# EAGLE board schema0.1 (EAGLE 9.6.2)
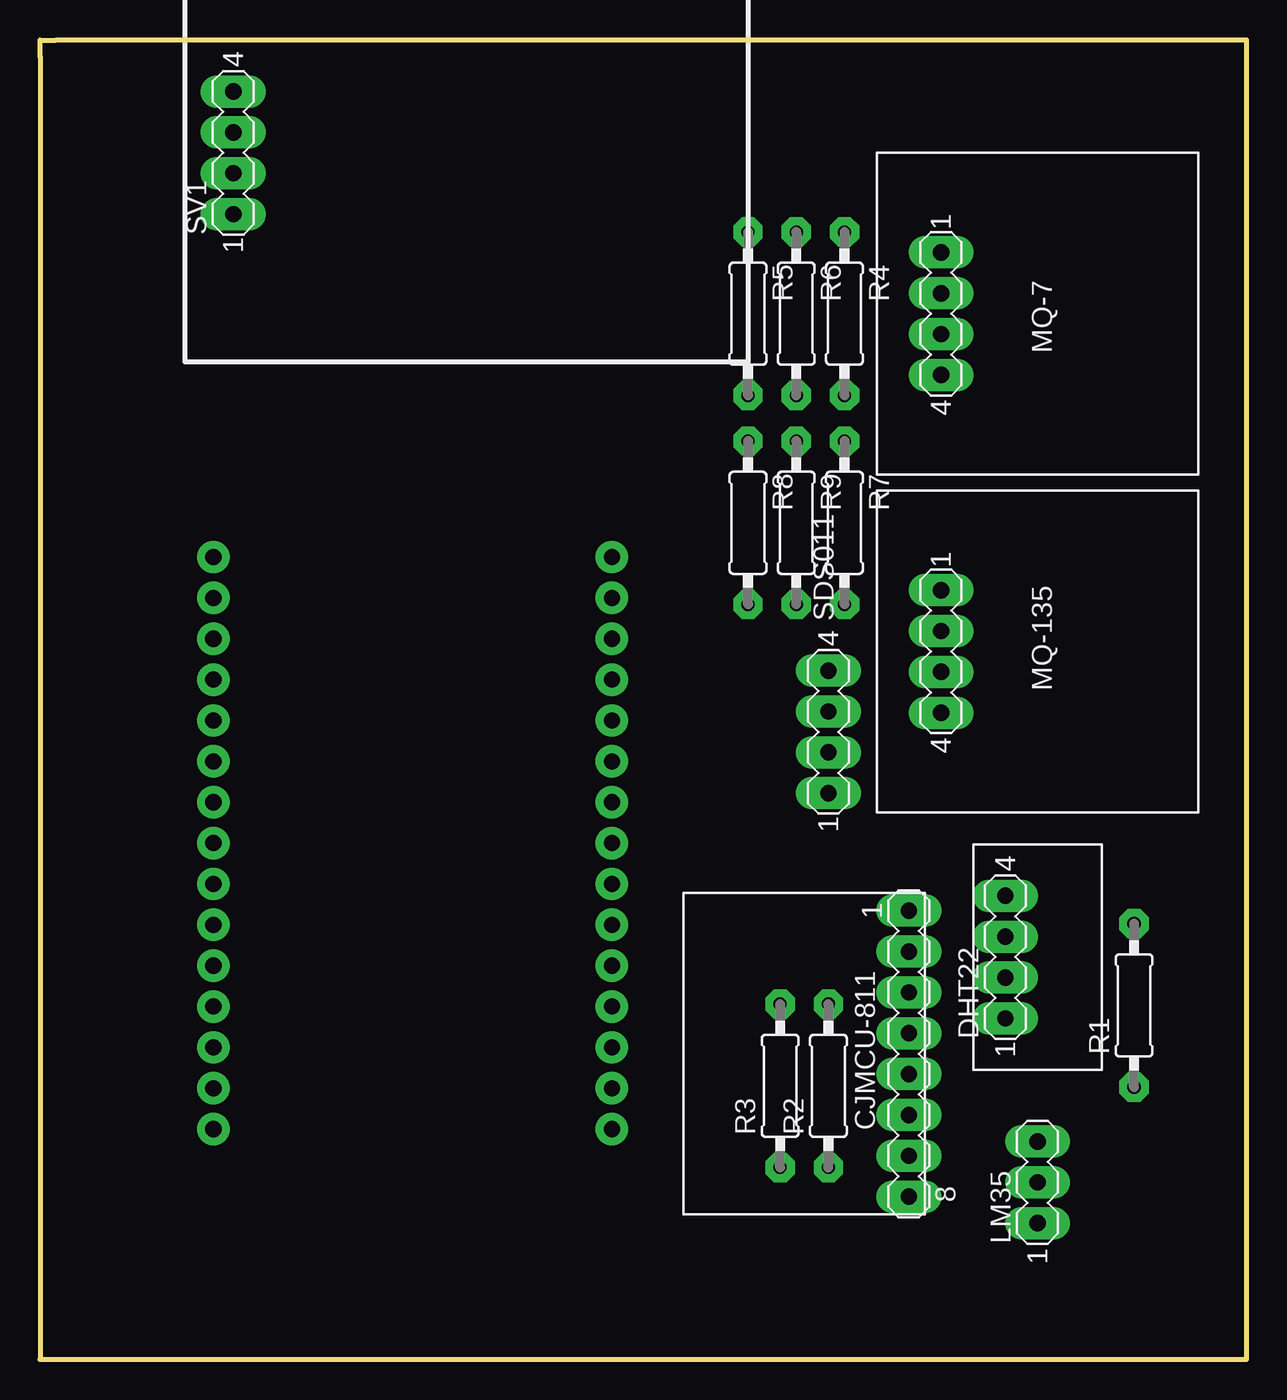
[diagram p0: board, top side]
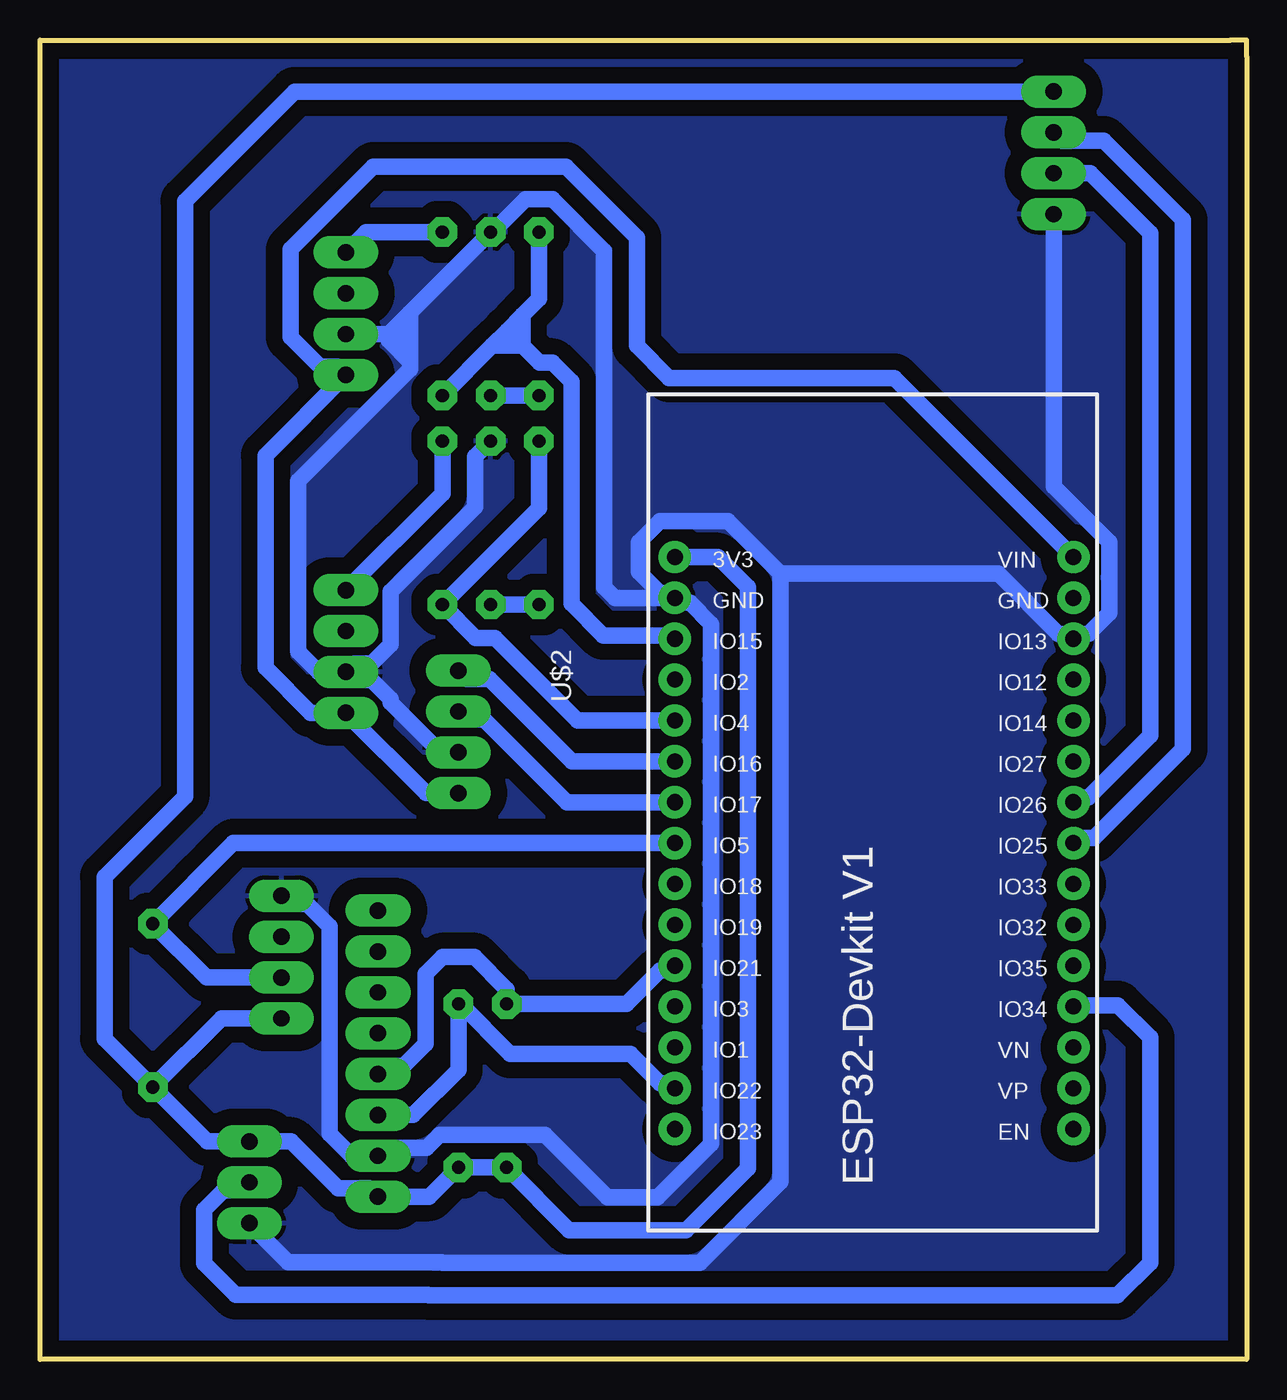
[diagram p1: board, bottom side, seen from below]

Size 75 x 82 mm. Coordinates in mm from the lower left corner, seen from the top.
Outline: 0,0 75,0 75,82 1,82 0,82 0,81 0,0
Copper layers (1*16): Top 0.035mm / dielectric 1.5mm / Bottom 0.035mm
Design rules "FreesMachien": minimum track width 40mil, minimum drill 0.4mm, track to track 40mil, track to pad 30mil, pad to pad 6mil, via to via 6mil, smd to smd 6mil, copper to edge 40mil, drill to drill 6mil, minimum pad ring 20mil, minimum via ring 20mil, stop-mask expansion 4mil, vias tented up to drill 0mil, thermal gap 10mil

## Footprints (pad centres in the part's own frame; a part is rotated, then mirrored left to right if it is on the bottom)
MA08-1 = drill 1.016 long: 1 -8.89,0; 2 -6.35,0; 3 -3.81,0; 4 -1.27,0; 5 1.27,0; 6 3.81,0; 7 6.35,0; 8 8.89,0
MA04-1 = drill 1.016 long: 1 -3.81,0; 2 -1.27,0; 3 1.27,0; 4 3.81,0
MA03-1 = drill 1.016 long: 1 -2.54,0; 2 0,0; 3 2.54,0
0207/10 = drill 0.813 octagon: 1 -5.08,0; 2 5.08,0
ESP32-DEVKITV1 = drill 1 pad 1.93: 1 -22.87,-13.54; 2 -20.33,-13.54; 3 -17.79,-13.54; 4 -15.25,-13.54; 5 -12.71,-13.54; 6 -10.17,-13.54; 7 -7.63,-13.54; 8 -5.09,-13.54; 9 -2.55,-13.54; 10 -0.01,-13.54; 11 2.53,-13.54; 12 5.07,-13.54; 13 7.61,-13.54; 14 10.15,-13.54; 15 12.69,-13.54; 16 12.69,11.23; 17 10.15,11.23; 18 7.61,11.23; 19 5.07,11.23; 20 2.53,11.23; 21 -0.01,11.23; 22 -2.55,11.23; 23 -5.09,11.23; 24 -7.63,11.23; 25 -10.17,11.23; 26 -12.71,11.23; 27 -15.25,11.23; 28 -17.79,11.23; 29 -20.33,11.23; 30 -22.87,11.23

## Placement (x,y rotation side)
CJMCU-811  [MA08-1]  54,19 270 top
DHT22  [MA04-1]  60,25 90 top
LM35  [MA03-1]  62,11 90 top
MQ-7  [MA04-1]  56,65 270 top
MQ-135  [MA04-1]  56,44 270 top
R1  10k  [0207/10]  68,22 90 top
R2  4k7  [0207/10]  49,17 90 top
R3  4k7  [0207/10]  46,17 90 top
R4  1k  [0207/10]  50,65 270 top
R5  1k  [0207/10]  44,65 270 top
R6  1k  [0207/10]  47,65 270 top
R7  1k  [0207/10]  50,52 270 top
R8  1k  [0207/10]  44,52 270 top
R9  1k  [0207/10]  47,52 270 top
SDS011  [MA04-1]  49,39 90 top
SV1  [MA04-1]  12,75 90 top
U$2  ESP32DEVKITV1  [ESP32-DEVKITV1]  22,27 270 bottom

## Library data of the parts
CJMCU-811 DHT22 LM35 MQ-7 MQ-135 SDS011 SV1 = con-lstb; OC_FARNELL: unknown; OC_NEWARK: unknown
R1-R9 = rcl; SPICEPREFIX: R
U$2 = ESP32-DEVKITV1

## Nets
0: MQ-7.1 R4.1
1: MQ-135.1 R7.1
3.3V: CJMCU-811.8 DHT22.1 LM35.3 R1.1 R2.1 R3.1 SV1.4 U$2.1
5V: MQ-7.4 MQ-135.4 SDS011.1 U$2.30
ALM35: LM35.2 U$2.19
AMQ-7: R4.2 R5.1 U$2.3
AMQ-135: R7.2 R8.1 U$2.5
DATADHT22: DHT22.2 R1.2 U$2.8
GND: CJMCU-811.7 DHT22.4 LM35.1 MQ-7.3 MQ-135.3 R6.1 R9.1 SDS011.2 SV1.1 U$2.2 U$2.28
N$1: R8.2 R9.2
N$2: R5.2 R6.2
N$14: DHT22.3
RX: SDS011.3 U$2.7
RX1: SV1.3 U$2.23
SCL: CJMCU-811.6 R2.2 U$2.14
SDA: CJMCU-811.5 R3.2 U$2.11
TX: SDS011.4 U$2.6
TX1: SV1.2 U$2.24

## Tracks (layer width: path | path; a pad name or v marks a point on that pad's centre or on a via)
0
  Bottom 1.016: R4.1 54.73,70.08 MQ-7.1
1
  Bottom 1.016: MQ-135.1 50,53.81 R7.1
3.3V
  Bottom 1.016: U$2.1 32.87,49.87 31,48 31,11.87 34.84,8.03 42.11,8.03 R3.1 R2.1 50.81,10.11 CJMCU-811.8 54.51,10.62 56.49,10.62 59.41,13.54 LM35.3 64.62,13.54 R1.1 | R1.1 63.73,21.19 DHT22.1 59.81,21 | R1.1 71,19.92 71,30 66,35 66,72 59.19,78.81 SV1.4
5V
  Bottom 1.016: SDS011.1 51,35.19 MQ-135.4 58.19,40.19 61,43 61,56.19 MQ-7.4 56.51,61.7 57.6,61.7 59.45,63.54 59.45,69 54.3,74.14 42.32,74.14 37.9,69.73 37.9,63 35.9,61 21.9,61 U$2.30
ALM35
  Bottom 1.016: U$2.19 10.84,22 8,22 6,20 6,6 8.03,3.97 50.84,3.97 50.87,4 62.84,4 64.79,5.95 64.79,9.3 63.6,10.49 62.51,10.49 LM35.2
AMQ-7
  Bottom 1.016: R4.2 46.92,63 | 46.92,63 45.96,63.96 | 45.96,63.96 45,64.92 | 45,64.92 44,65.92 R5.1 | 45,63 43.95,61.95 43.16,61.95 41.97,60.76 41.97,46.97 40,45 35.75,45 U$2.3 | 45,63 45,64.92 | 45,63 46.92,63 | 45.96,63.96 45,63
AMQ-135
  Bottom 1.016: R8.1 44,52.92 R7.2 47.92,44.84 46.73,44.84 41.6,39.71 U$2.5
DATADHT22
  Bottom 1.016: DHT22.2 64.65,23.73 R1.2 62.99,32.09 U$2.8
GND
  Bottom 1.016: MQ-7.3 53.35,63.73 | 52.04,65.04 R6.1 46.87,70.08 44.84,72.11 43.16,72.11 39.94,68.89 39.94,48 39.27,47.33 U$2.2 | 52.04,65.04 53.35,63.73 | MQ-135.3 55.49,42.22 54.4,42.22 53.21,41.03 53.21,40.84 50.1,37.73 SDS011.2 | MQ-135.3 57.7,42.73 58.97,44 58.97,54.59 52,61.55 52,62 | 52.04,65.04 52,65 52,64 | 52,62 52,64 | 53.35,63.73 52.27,63.73 52,64 | 53.35,63.73 53.35,63.35 52,62 | R9.1 47.97,56.11 47.97,52.97 53.21,47.73 53.21,44.43 54.4,43.24 55.49,43.24 MQ-135.3 | U$2.2 35.84,47.63 36.47,47.63 37.77,48.94 37.77,50.8 36.47,52.1 32.23,52.1 28.97,48.84 | 28.97,48.84 28.97,11.03 34,6 50,6 50.03,6.03 59.57,6.03 LM35.1 | 28.97,48.84 15.44,48.84 11.7,45.09 11.07,45.09 U$2.28 10.46,45.09 9.84,45.09 8.54,46.4 8.54,50.8 12,54.26 SV1.1 | DHT22.4 59.49,28.3 58.4,28.3 57,26.91 57,14 55.65,12.65 CJMCU-811.7 53.49,13.16 50.97,13.16 50.17,13.95 43.62,13.95 39.74,10.07 36.61,10.07 33.3,13.38 33.3,45.72 34.62,47.03 35.24,47.03 U$2.2
  pour Bottom: 66,79 66,3 5,3 5,79
KOPER
  pour Bottom: 0,82 75,82 75,0 0,0
N$1
  Bottom 1.016: R8.2 R9.2
N$2
  Bottom 1.016: R5.2 R6.2
RX
  Bottom 1.016: SDS011.3 48.49,39.76 47.4,39.76 42.26,34.63 U$2.7
RX1
  Bottom 1.016: SV1.3 11.49,75.76 8.89,75.76 3.97,70.84 3.97,37.94 9.51,32.4 10.46,32.4 U$2.23
SCL
  Bottom 1.016: CJMCU-811.6 51.81,15.19 49,18 R2.2 48.87,22.08 45.79,19 38.31,19 36.47,17.16 35.84,17.16 U$2.14
SDA
  Bottom 1.016: CJMCU-811.5 53.49,18.24 52.4,18.24 51.03,19.6 51.03,23.97 50,25 48,25 46,23 R3.2 38.55,22.08 36.47,24.16 35.84,24.16 U$2.11
TX
  Bottom 1.016: SDS011.4 48.49,42.3 47.06,42.3 41.93,37.17 U$2.6
TX1
  Bottom 1.016: U$2.24 10.46,34.94 9.84,34.94 6,38.78 6,70 9.73,73.73 SV1.2